# Allegro board H313_REF_LPDDR4_32X1-4L-200119-V163.brd
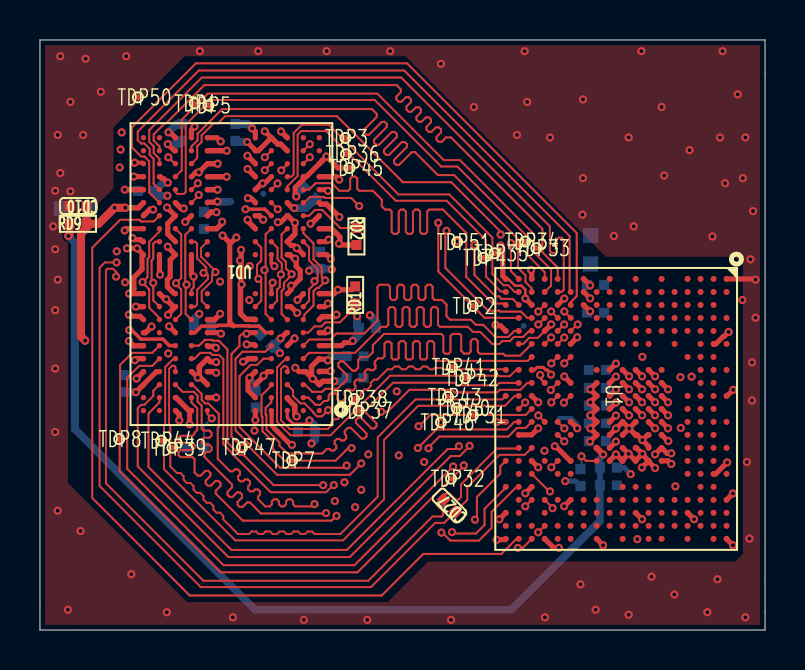
[diagram p0: board, top side]
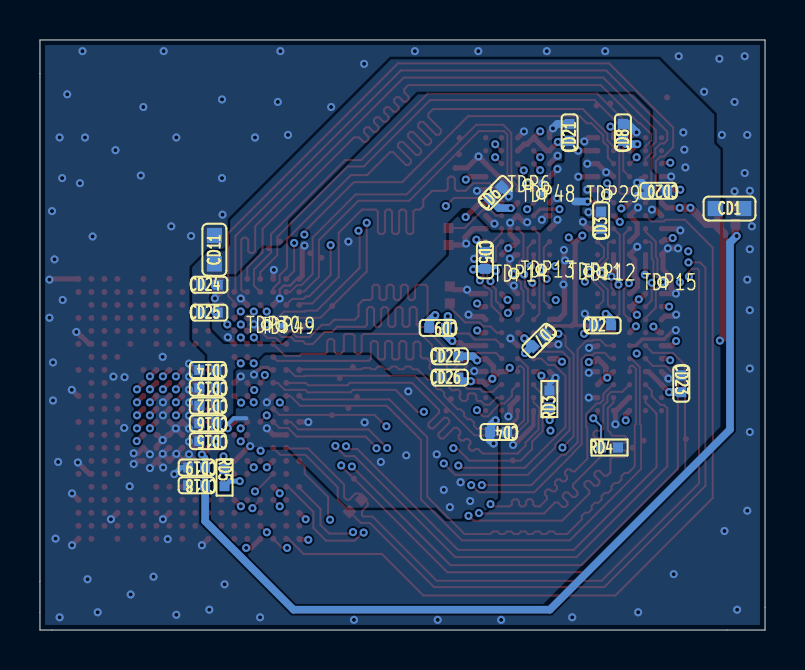
[diagram p1: board, bottom side, seen from below]

Outline 36.29 x 29.51 mm; copper layers: TOP, L2, L3, BOTTOM. Coordinates in mm from the lower left corner of the outline.
Outline path: 0,29.51 0,0 36.29,0 36.29,29.51 0,29.51

## Design rules (mm)
net group SCK: nets SCKN SCKP
net group SDQS0: nets SDQS0N SDQS0P
net group SDQS1: nets SDQS1N SDQS1P
net group SDQS2: nets SDQS2N SDQS2P
net group SDQS3: nets SDQS3N SDQS3P
net group DDR-DQ-DQM1-200MIL: nets SDQ8 SDQ9 SDQ10 SDQ11 SDQ12 SDQ13 SDQ14 SDQ15 SDQM1
net group DDR-DQ-DQS0-500MIL: nets SDQ0 SDQ2 SDQ3 SDQ4 SDQ5 SDQ6 SDQ7 SDQM0
net group DDR-DQ-DQS2-500MIL: nets SDQ17 SDQ18 SDQ19 SDQ20 SDQ21 SDQ22 SDQ23 SDQM2
net group DDR-DQ-DQS3-500MIL: nets SDQ24 SDQ25 SDQ26 SDQ27 SDQ28 SDQ30 SDQ31 SDQM3

## Placement (name value [footprint] x y rotation side)
CD1  NC-10uF-6.3V  [C0603]  1.78 21.08 180 bottom
CD2  1uF  [C0402]  8.13 15.24 180 bottom
CD3  NC-1uF  [C0402]  8.2 20.5 90 bottom
CD4  1uF  [C0402]  13.33 9.91 0 bottom
CD5  104  [C0402]  14.02 18.49 270 bottom
CD6  104  [C0402]  13.49 21.87 135 bottom
CD7  104  [C0402]  11.3 14.48 315 bottom
CD8  104  [C0402]  7.11 24.89 90 bottom
CD9  1uF  [C0402]  16.38 15.11 0 bottom
CD10  104  [C0402]  1.91 21.21 180 top
CD11  NC-10uF-6.3V  [C0603]  27.56 19.02 90 bottom
CD12  2.2nF  [C0402]  27.89 11.23 0 bottom
CD13  1uF  [C0402]  27.89 12.12 0 bottom
CD14  NC-4.7nF  [C0402]  27.89 13 0 bottom
CD15  2.2nF  [C0402]  27.89 9.45 0 bottom
CD16  2.2nF  [C0402]  27.89 10.34 0 bottom
CD18  1uF  [C0402]  28.45 7.24 0 bottom
CD19  104  [C0402]  28.45 8.13 0 bottom
CD20  NC-1uF  [C0402]  5.33 21.97 0 bottom
CD21  1uF  [C0402]  9.78 24.89 90 bottom
CD22  NC-104  [C0402]  15.77 13.69 180 bottom
CD23  104  [C0402]  4.19 12.32 270 bottom
CD24  NC-1uF  [C0402]  27.81 17.27 180 bottom
CD25  NC-104  [C0402]  27.81 15.88 180 bottom
CD26  104  [C0402]  15.77 12.62 180 bottom
CD27  NC/2.2pf  [C0402]  20.5 6.22 135 top
RD1  100K  [R0402]  15.77 16.76 90 top
RD2  100K  [R0402]  15.84 19.68 270 top
RD3  240R-1%  [R0402]  10.79 11.56 90 bottom
RD4  240R-1%  [R0402]  7.78 9.13 180 bottom
RD5  240R-1%  [R0402]  27.05 7.62 270 bottom
RD9  0R  [R0402]  1.91 20.32 0 top
TDP1  SDQS0P  [TP30]  7.75 26.34 0 top
TDP2  SDQ1  [TP30]  21.67 16.21 0 top
TDP3  SDQS1P  [TP30]  15.29 24.61 0 top
TDP4  SDQS1N  [TP30]  22.2 18.62 0 top
TDP5  SDQS0N  [TP30]  8.43 26.24 0 top
TDP6  SDQ11  [TP30]  11.86 22.3 180 bottom
TDP7  SDQ16  [TP30]  12.62 8.48 0 top
TDP8  SDQ29  [TP30]  3.96 9.55 0 top
TDP11  SCKP  [TP30]  8.81 17.93 180 bottom
TDP12  SCKN  [TP30]  8.15 17.88 180 bottom
TDP13  SCS0  [TP30]  11.2 18.03 180 bottom
TDP14  SCS1  [TP30]  12.57 17.83 180 bottom
TDP15  SA4  [TP30]  5.11 17.4 180 bottom
TDP29  SDQ1  [TP30]  7.92 21.79 180 bottom
TDP30  SDQ11  [TP30]  24.94 15.27 180 bottom
TDP31  SDQ16  [TP30]  21.67 10.74 0 top
TDP32  SDQ29  [TP30]  20.57 7.57 0 top
TDP33  SDQS0P  [TP30]  24.84 19.1 0 top
TDP34  SDQS0N  [TP30]  24.28 19.43 0 top
TDP35  SDQS1P  [TP30]  22.76 18.85 0 top
TDP36  SDQS1N  [TP30]  15.32 23.8 0 top
TDP37  SDQS2N  [TP30]  15.95 10.97 0 top
TDP38  SDQS2P  [TP30]  15.72 11.56 0 top
TDP39  SDQS3P  [TP30]  6.63 9.12 0 top
TDP40  SDQS3N  [TP30]  20.85 11.1 0 top
TDP41  SDQS2P  [TP30]  20.62 13.16 0 top
TDP42  SDQS2N  [TP30]  21.29 12.6 0 top
TDP43  SDQS3P  [TP30]  20.42 11.66 0 top
TDP44  SDQS3N  [TP30]  6.07 9.47 0 top
TDP45  GND  [TP30]  15.49 23.11 0 top
TDP46  GND  [TP30]  20.07 10.39 0 top
TDP47  GND  [TP30]  10.11 9.14 0 top
TDP48  GND  [TP30]  11.18 21.82 180 bottom
TDP49  GND  [TP30]  24.21 15.21 180 bottom
TDP50  GND  [TP30]  4.9 26.64 0 top
TDP51  GND  [TP30]  20.88 19.41 0 top
U1  H313-BGA-284  [BGA284P65B1200_1400H125]  28.84 11.06 270 top
UD1  LPDDR4_FBGA200  [BGA200P65_80B1000_1500H90]  9.58 17.8 180 top

## Library data of the parts
CD1 CD11 = C-C0603-X5R
CD2-CD10 CD12-CD16 CD18-CD27 = C-C0402-X5R_0
RD1 RD2 = R-R0402-5%_0
RD3-RD5 RD9 = R-R0402-1%_0
TDP1-TDP8 TDP11-TDP15 TDP29-TDP51 = TestPoint-on wire
U1 = H313-BGA-284
UD1 = LPDDR4_FBGA200

## Footprints (pads in the part's own frame, mm; a bottom-side part is the same pattern mirrored in y, then rotated)
BGA200P65_80B1000_1500H90
  round 0.27 smd: A1(-4.4,6.825) A2(-3.6,6.825) A3(-2.8,6.825) A4(-2,6.825) A5(-1.2,6.825) A8(1.2,6.825) A9(2,6.825) A10(2.8,6.825) A11(3.6,6.825) A12(4.4,6.825) AA1(-4.4,-6.175) AA2(-3.6,-6.175) AA3(-2.8,-6.175) AA4(-2,-6.175) AA5(-1.2,-6.175) AA8(1.2,-6.175) AA9(2,-6.175) AA10(2.8,-6.175) AA11(3.6,-6.175) AA12(4.4,-6.175) AB1(-4.4,-6.825) AB2(-3.6,-6.825) AB3(-2.8,-6.825) AB4(-2,-6.825) AB5(-1.2,-6.825) AB8(1.2,-6.825) AB9(2,-6.825) AB10(2.8,-6.825) AB11(3.6,-6.825) AB12(4.4,-6.825) B1(-4.4,6.175) B2(-3.6,6.175) B3(-2.8,6.175) B4(-2,6.175) B5(-1.2,6.175) B8(1.2,6.175) B9(2,6.175) B10(2.8,6.175) B11(3.6,6.175) B12(4.4,6.175) C1(-4.4,5.525) C2(-3.6,5.525) C3(-2.8,5.525) C4(-2,5.525) C5(-1.2,5.525) C8(1.2,5.525) C9(2,5.525) C10(2.8,5.525) C11(3.6,5.525) C12(4.4,5.525) D1(-4.4,4.875) D2(-3.6,4.875) D3(-2.8,4.875) D4(-2,4.875) D5(-1.2,4.875) D8(1.2,4.875) D9(2,4.875) D10(2.8,4.875) D11(3.6,4.875) D12(4.4,4.875) E1(-4.4,4.225) E2(-3.6,4.225) E3(-2.8,4.225) E4(-2,4.225) E5(-1.2,4.225) E8(1.2,4.225) E9(2,4.225) E10(2.8,4.225) E11(3.6,4.225) E12(4.4,4.225) F1(-4.4,3.575) F2(-3.6,3.575) F3(-2.8,3.575) F4(-2,3.575) F5(-1.2,3.575) F8(1.2,3.575) F9(2,3.575) F10(2.8,3.575) F11(3.6,3.575) F12(4.4,3.575) G1(-4.4,2.925) G2(-3.6,2.925) G3(-2.8,2.925) G4(-2,2.925) G5(-1.2,2.925) G8(1.2,2.925) G9(2,2.925) G10(2.8,2.925) G11(3.6,2.925) G12(4.4,2.925) H1(-4.4,2.275) H2(-3.6,2.275) H3(-2.8,2.275) H4(-2,2.275) H5(-1.2,2.275) H8(1.2,2.275) H9(2,2.275) H10(2.8,2.275) H11(3.6,2.275) H12(4.4,2.275) J1(-4.4,1.625) J2(-3.6,1.625) J3(-2.8,1.625) J4(-2,1.625) J5(-1.2,1.625) J8(1.2,1.625) J9(2,1.625) J10(2.8,1.625) J11(3.6,1.625) J12(4.4,1.625) K1(-4.4,0.975) K2(-3.6,0.975) K3(-2.8,0.975) K4(-2,0.975) K5(-1.2,0.975) K8(1.2,0.975) K9(2,0.975) K10(2.8,0.975) K11(3.6,0.975) K12(4.4,0.975) N1(-4.4,-0.975) N2(-3.6,-0.975) N3(-2.8,-0.975) N4(-2,-0.975) N5(-1.2,-0.975) N8(1.2,-0.975) N9(2,-0.975) N10(2.8,-0.975) N11(3.6,-0.975) N12(4.4,-0.975) P1(-4.4,-1.625) P2(-3.6,-1.625) P3(-2.8,-1.625) P4(-2,-1.625) P5(-1.2,-1.625) P8(1.2,-1.625) P9(2,-1.625) P10(2.8,-1.625) P11(3.6,-1.625) P12(4.4,-1.625) R1(-4.4,-2.275) R2(-3.6,-2.275) R3(-2.8,-2.275) R4(-2,-2.275) R5(-1.2,-2.275) R8(1.2,-2.275) R9(2,-2.275) R10(2.8,-2.275) R11(3.6,-2.275) R12(4.4,-2.275) T1(-4.4,-2.925) T2(-3.6,-2.925) T3(-2.8,-2.925) T4(-2,-2.925) T5(-1.2,-2.925) T8(1.2,-2.925) T9(2,-2.925) T10(2.8,-2.925) T11(3.6,-2.925) T12(4.4,-2.925) U1(-4.4,-3.575) U2(-3.6,-3.575) U3(-2.8,-3.575) U4(-2,-3.575) U5(-1.2,-3.575) U8(1.2,-3.575) U9(2,-3.575) U10(2.8,-3.575) U11(3.6,-3.575) U12(4.4,-3.575) V1(-4.4,-4.225) V2(-3.6,-4.225) V3(-2.8,-4.225) V4(-2,-4.225) V5(-1.2,-4.225) V8(1.2,-4.225) V9(2,-4.225) V10(2.8,-4.225) V11(3.6,-4.225) V12(4.4,-4.225) W1(-4.4,-4.875) W2(-3.6,-4.875) W3(-2.8,-4.875) W4(-2,-4.875) W5(-1.2,-4.875) W8(1.2,-4.875) W9(2,-4.875) W10(2.8,-4.875) W11(3.6,-4.875) W12(4.4,-4.875) Y1(-4.4,-5.525) Y2(-3.6,-5.525) Y3(-2.8,-5.525) Y4(-2,-5.525) Y5(-1.2,-5.525) Y8(1.2,-5.525) Y9(2,-5.525) Y10(2.8,-5.525) Y11(3.6,-5.525) Y12(4.4,-5.525)
BGA284P65B1200_1400H125
  round 0.3 smd: A1(-6.5,5.525) A2(-5.85,5.525) A4(-4.55,5.525) A6(-3.25,5.525) A8(-1.95,5.525) A10(-0.65,5.525) A12(0.65,5.525) A14(1.95,5.525) A16(3.25,5.525) A18(4.55,5.525) A19(5.2,5.525) A20(5.85,5.525) A21(6.5,5.525) B1(-6.5,4.875) B2(-5.85,4.875) B3(-5.2,4.875) B4(-4.55,4.875) B5(-3.9,4.875) B6(-3.25,4.875) B7(-2.6,4.875) B8(-1.95,4.875) B9(-1.3,4.875) B10(-0.65,4.875) B11(0,4.875) B12(0.65,4.875) B13(1.3,4.875) B14(1.95,4.875) B15(2.6,4.875) B16(3.25,4.875) B17(3.9,4.875) B18(4.55,4.875) B19(5.2,4.875) B20(5.85,4.875) B21(6.5,4.875) C1(-6.5,4.225) C2(-5.85,4.225) C3(-5.2,4.225) C4(-4.55,4.225) C5(-3.9,4.225) C6(-3.25,4.225) C7(-2.6,4.225) C8(-1.95,4.225) C9(-1.3,4.225) C10(-0.65,4.225) C11(0,4.225) C12(0.65,4.225) C13(1.3,4.225) C14(1.95,4.225) C15(2.6,4.225) C16(3.25,4.225) C17(3.9,4.225) C18(4.55,4.225) C19(5.2,4.225) C20(5.85,4.225) D1(-6.5,3.575) D2(-5.85,3.575) D3(-5.2,3.575) D4(-4.55,3.575) D5(-3.9,3.575) D7(-2.6,3.575) D10(-0.65,3.575) D11(0,3.575) D12(0.65,3.575) D13(1.3,3.575) D14(1.95,3.575) D15(2.6,3.575) D16(3.25,3.575) D18(4.55,3.575) D19(5.2,3.575) D20(5.85,3.575) D21(6.5,3.575) E2(-5.85,2.925) E3(-5.2,2.925) E4(-4.55,2.925) E5(-3.9,2.925) E6(-3.25,2.925) E18(4.55,2.925) E19(5.2,2.925) E20(5.85,2.925) F1(-6.5,2.275) F2(-5.85,2.275) F3(-5.2,2.275) F4(-4.55,2.275) F5(-3.9,2.275) F8(-1.95,2.275) F9(-1.3,2.275) F10(-0.65,2.275) F11(0,2.275) F12(0.65,2.275) F13(1.3,2.275) F14(1.95,2.275) F15(2.6,2.275) F18(4.55,2.275) F19(5.2,2.275) F20(5.85,2.275) F21(6.5,2.275) G2(-5.85,1.625) G3(-5.2,1.625) G4(-4.55,1.625) G5(-3.9,1.625) G6(-3.25,1.625) G8(-1.95,1.625) G9(-1.3,1.625) G10(-0.65,1.625) G11(0,1.625) G12(0.65,1.625) G13(1.3,1.625) G14(1.95,1.625) G15(2.6,1.625) G17(3.9,1.625) G18(4.55,1.625) G19(5.2,1.625) G20(5.85,1.625) G21(6.5,1.625) H1(-6.5,0.975) H2(-5.85,0.975) H3(-5.2,0.975) H4(-4.55,0.975) H5(-3.9,0.975) H6(-3.25,0.975) H8(-1.95,0.975) H9(-1.3,0.975) H10(-0.65,0.975) H11(0,0.975) H12(0.65,0.975) H13(1.3,0.975) H14(1.95,0.975) H15(2.6,0.975) H17(3.9,0.975) H18(4.55,0.975) H19(5.2,0.975) H20(5.85,0.975) J2(-5.85,0.325) J3(-5.2,0.325) J6(-3.25,0.325) J8(-1.95,0.325) J9(-1.3,0.325) J10(-0.65,0.325) J11(0,0.325) J12(0.65,0.325) J13(1.3,0.325) J14(1.95,0.325) J15(2.6,0.325) J17(3.9,0.325) J18(4.55,0.325) J19(5.2,0.325) J20(5.85,0.325) J21(6.5,0.325) K1(-6.5,-0.325) K2(-5.85,-0.325) K3(-5.2,-0.325) K4(-4.55,-0.325) K5(-3.9,-0.325) K6(-3.25,-0.325) K8(-1.95,-0.325) K9(-1.3,-0.325) K10(-0.65,-0.325) K11(0,-0.325) K12(0.65,-0.325) K13(1.3,-0.325) K14(1.95,-0.325) K15(2.6,-0.325) K18(4.55,-0.325) K19(5.2,-0.325) K20(5.85,-0.325) L2(-5.85,-0.975) L3(-5.2,-0.975) L4(-4.55,-0.975) L5(-3.9,-0.975) L6(-3.25,-0.975) L8(-1.95,-0.975) L9(-1.3,-0.975) L10(-0.65,-0.975) L11(0,-0.975) L12(0.65,-0.975) L13(1.3,-0.975) L14(1.95,-0.975) L15(2.6,-0.975) L18(4.55,-0.975) L19(5.2,-0.975) L20(5.85,-0.975) L21(6.5,-0.975) M1(-6.5,-1.625) M2(-5.85,-1.625) M3(-5.2,-1.625) M18(4.55,-1.625) M19(5.2,-1.625) M20(5.85,-1.625) N2(-5.85,-2.275) N3(-5.2,-2.275) N4(-4.55,-2.275) N5(-3.9,-2.275) N6(-3.25,-2.275) N7(-2.6,-2.275) N9(-1.3,-2.275) N10(-0.65,-2.275) N12(0.65,-2.275) N13(1.3,-2.275) N15(2.6,-2.275) N16(3.25,-2.275) N18(4.55,-2.275) N19(5.2,-2.275) N20(5.85,-2.275) N21(6.5,-2.275) P1(-6.5,-2.925) P2(-5.85,-2.925) P3(-5.2,-2.925) P4(-4.55,-2.925) P5(-3.9,-2.925) P6(-3.25,-2.925) P7(-2.6,-2.925) P9(-1.3,-2.925) P10(-0.65,-2.925) P12(0.65,-2.925) P13(1.3,-2.925) P15(2.6,-2.925) P16(3.25,-2.925) P18(4.55,-2.925) P20(5.85,-2.925) P21(6.5,-2.925) R1(-6.5,-3.575) R2(-5.85,-3.575) R3(-5.2,-3.575) R4(-4.55,-3.575) R5(-3.9,-3.575) R6(-3.25,-3.575) R9(-1.3,-3.575) R12(0.65,-3.575) R15(2.6,-3.575) R18(4.55,-3.575) R19(5.2,-3.575) R20(5.85,-3.575) R21(6.5,-3.575) T1(-6.5,-4.225) T2(-5.85,-4.225) T3(-5.2,-4.225) T4(-4.55,-4.225) T5(-3.9,-4.225) T6(-3.25,-4.225) T7(-2.6,-4.225) T8(-1.95,-4.225) T9(-1.3,-4.225) T10(-0.65,-4.225) T11(0,-4.225) T12(0.65,-4.225) T14(1.95,-4.225) T15(2.6,-4.225) T16(3.25,-4.225) T17(3.9,-4.225) T18(4.55,-4.225) T20(5.85,-4.225) T21(6.5,-4.225) U1(-6.5,-4.875) U2(-5.85,-4.875) U3(-5.2,-4.875) U4(-4.55,-4.875) U5(-3.9,-4.875) U6(-3.25,-4.875) U8(-1.95,-4.875) U9(-1.3,-4.875) U10(-0.65,-4.875) U11(0,-4.875) U12(0.65,-4.875) U13(1.3,-4.875) U14(1.95,-4.875) U15(2.6,-4.875) U16(3.25,-4.875) U17(3.9,-4.875) U18(4.55,-4.875) U19(5.2,-4.875) U20(5.85,-4.875) U21(6.5,-4.875) V1(-6.5,-5.525) V2(-5.85,-5.525) V3(-5.2,-5.525) V5(-3.9,-5.525) V8(-1.95,-5.525) V10(-0.65,-5.525) V12(0.65,-5.525) V15(2.6,-5.525) V17(3.9,-5.525) V19(5.2,-5.525) V20(5.85,-5.525) V21(6.5,-5.525)
C0402
  rect 0.5x0.5 smd: 1(-0.425,0) 2(0.425,0)
C0603
  rect 0.76x0.76 smd: 1(-0.71,0) 2(0.71,0)
R0402
  rect 0.5x0.5 smd: 1(-0.425,0) 2(0.425,0)
TP30
  round 0.3 smd: 1(0,0)

## Nets
GND: CD1.2 CD2.2 CD3.2 CD4.2 CD5.2 CD6.2 CD7.2 CD8.2 CD9.2 CD10.2 CD11.2 CD12.2 CD13.2 CD14.2 CD15.2 CD16.2 CD18.2 CD19.2 CD20.2 CD21.2 CD22.2 CD23.2 CD24.2 CD25.2 CD26.2 RD5.2 TDP45.1(TP) TDP46.1(TP) TDP47.1(TP) TDP48.1(TP) TDP49.1(TP) TDP50.1(TP) TDP51.1(TP) U1.A1(GND1) U1.A10(GND2) U1.A18(GND3) U1.A21(GND4) U1.B6(GND5) U1.B16(GND6) U1.D19(GND7) U1.F14(GND8) U1.F15(GND9) U1.G13(GND10) U1.G14(GND11) U1.G15(GND12) U1.H10(GND13) U1.H11(GND14) U1.H12(GND15) U1.H13(GND16) U1.H14(GND17) U1.H15(GND18) U1.H19(GND19) U1.J12(GND20) U1.J13(GND21) U1.J14(GND22) U1.J15(GND23) U1.K8(GND25) U1.K9(GND26) U1.K10(GND27) U1.K11(GND28) U1.K12(GND29) U1.K13(GND30) U1.K14(GND31) U1.K15(GND32) U1.L21(GND33) U1.M1(GND24) U1.M2(GND34) U1.M3(GND35) U1.N6(GND36) U1.N9(GND37) U1.N12(GND38) U1.N15(GND39) U1.N18(GND40) U1.P3(GND41) U1.R5(GND42) U1.R21(GND43) U1.T1(GND44) U1.T3(GND45) U1.T8(GND46) U1.T10(GND47) U1.T15(GND48) U1.T17(GND49) U1.U6(GND50) U1.U13(GND51) U1.V1(GND52) U1.V5(GND53) U1.V12(GND54) U1.V19(GND55) U1.V21(GND56) UD1.A3(VSS0) UD1.A10(VSS1) UD1.AB3(VSS54) UD1.AB5(VSS55) UD1.AB8(VSS56) UD1.AB10(VSS57) UD1.C1(VSS2) UD1.C5(VSS3) UD1.C8(VSS4) UD1.C12(VSS5) UD1.D2(VSS6) UD1.D4(VSS7) UD1.D9(VSS8) UD1.D11(VSS9) UD1.E1(VSS10) UD1.E5(VSS11) UD1.E8(VSS12) UD1.E12(VSS13) UD1.G1(VSS14) UD1.G3(VSS15) UD1.G5(VSS16) UD1.G8(VSS17) UD1.G10(VSS18) UD1.G12(VSS19) UD1.J1(VSS20) UD1.J3(VSS21) UD1.J10(VSS22) UD1.J12(VSS23) UD1.K2(VSS24) UD1.K4(VSS25) UD1.K9(VSS26) UD1.K11(VSS27) UD1.N2(VSS28) UD1.N4(VSS29) UD1.N9(VSS30) UD1.N11(VSS31) UD1.P1(VSS32) UD1.P3(VSS33) UD1.P10(VSS34) UD1.P12(VSS35) UD1.T1(VSS36) UD1.T3(VSS37) UD1.T5(VSS38) UD1.T8(VSS39) UD1.T10(VSS40) UD1.T12(VSS41) UD1.V1(VSS42) UD1.V5(VSS43) UD1.V8(VSS44) UD1.V12(VSS45) UD1.W2(VSS46) UD1.W4(VSS47) UD1.W9(VSS48) UD1.W11(VSS49) UD1.Y1(VSS50) UD1.Y5(VSS51) UD1.Y8(VSS52) UD1.Y12(VSS53)
VCC-DRAM: CD1.1 CD2.1 CD3.1 CD4.1 CD5.1 CD6.1 CD7.1 CD8.1 CD11.1 CD12.1 CD13.1 CD14.1 CD15.1 CD16.1 CD20.1 CD21.1 CD22.1 CD23.1 CD24.1 CD25.1 CD26.1 RD1.2 RD2.2 RD3.2 RD4.2 U1.L9(VCC_DRAM1) U1.L10(VCC_DRAM2) U1.L11(VCC_DRAM3) U1.L12(VCC_DRAM4) U1.L13(VCC_DRAM5) UD1.A4(VDD2-0) UD1.A9(VDD2-1) UD1.AA3(VDDQ-16) UD1.AA5(VDDQ-17) UD1.AA8(VDDQ-18) UD1.AA10(VDDQ-19) UD1.AB4(VDD2-22) UD1.AB9(VDD2-23) UD1.B3(VDDQ-0) UD1.B5(VDDQ-1) UD1.B8(VDDQ-2) UD1.B10(VDDQ-3) UD1.D1(VDDQ-4) UD1.D5(VDDQ-5) UD1.D8(VDDQ-6) UD1.D12(VDDQ-7) UD1.F3(VDDQ-8) UD1.F5(VDD2-2) UD1.F8(VDD2-3) UD1.F10(VDDQ-9) UD1.H1(VDD2-4) UD1.H5(VDD2-5) UD1.H8(VDD2-6) UD1.H12(VDD2-7) UD1.K1(VDD2-8) UD1.K3(VDD2-9) UD1.K10(VDD2-10) UD1.K12(VDD2-11) UD1.N1(VDD2-12) UD1.N3(VDD2-13) UD1.N10(VDD2-14) UD1.N12(VDD2-15) UD1.R1(VDD2-16) UD1.R5(VDD2-17) UD1.R8(VDD2-18) UD1.R12(VDD2-19) UD1.U3(VDDQ-10) UD1.U5(VDD2-20) UD1.U8(VDD2-21) UD1.U10(VDDQ-11) UD1.W1(VDDQ-12) UD1.W5(VDDQ-13) UD1.W8(VDDQ-14) UD1.W12(VDDQ-15)
VDD18-DRAM: CD18.1 CD19.1 RD9.1 U1.L14(VDD18_DRAM)
VDD18-LPDDR: CD9.1 CD10.1 RD9.2 UD1.F1(VDD1-0) UD1.F12(VDD1-1) UD1.G4(VDD1-2) UD1.G9(VDD1-3) UD1.T4(VDD1-4) UD1.T9(VDD1-5) UD1.U1(VDD1-6) UD1.U12(VDD1-7)
VDD-CPU: U1.H8(VDD_CPU1) U1.H9(VDD_CPU2) U1.J8(VDD_CPU3) U1.J9(VDD_CPU4) U1.J10(VDD_CPU5) U1.J11(VDD_CPU6)
VDD-GPU: U1.F9(VDD_GPU1) U1.F10(VDD_GPU2) U1.G8(VDD_GPU3) U1.G9(VDD_GPU4)
VDD-SYS: U1.F11(VDD_SYS1) U1.F12(VDD_SYS2) U1.F13(VDD_SYS3) U1.G10(VDD_SYS4) U1.G11(VDD_SYS5) U1.G12(VDD_SYS6)
SA0: U1.U17(SA1) UD1.H2(CA0_A) UD1.R2(CA0_B)
SA1: U1.V17(SCS0) UD1.J2(CA1_A) UD1.P2(CA1_B)
SA2: U1.T21(SA0) UD1.H9(CA2_A) UD1.R9(CA2_B)
SA3: U1.R20(SCS1) UD1.H10(CA3_A) UD1.R10(CA3_B)
SA4: TDP15.1(TP) U1.R18(SA4) UD1.H11(CA4_A) UD1.R11(CA4_B)
SA5: U1.T16(SA3) UD1.J11(CA5_A) UD1.P11(CA5_B)
SCKE0: U1.V15(SCKE0) UD1.J4(CKE0_A) UD1.P4(CKE0_B)
SCKE1: U1.P13(SCKE1) UD1.J5(CKE1_A) UD1.P5(CKE1_B)
SCKN: CD27.2 TDP12.1(TP) U1.U14(SCKN) UD1.J9(CK_C_A) UD1.P9(CK_C_B)
SCKP: CD27.1 TDP11.1(TP) U1.T14(SCKP) UD1.J8(CK_T_A) UD1.P8(CK_T_B)
SCS0: TDP13.1(TP) U1.T18(SA2) UD1.H4(CS0_A) UD1.R4(CS0_B)
SCS1: TDP14.1(TP) U1.P15(SA5) UD1.H3(CS1_A) UD1.R3(CS1_B)
SDQ0: U1.N3(SDQ0) UD1.U11(DQ11_B)
SDQ1: TDP2.1(TP) TDP29.1(TP) U1.U4(SDQ1) UD1.U9(DQ12_B)
SDQ2: U1.N2(SDQ2) UD1.V11(DQ10_B)
SDQ3: U1.T4(SDQ3) UD1.V9(DQ13_B)
SDQ4: U1.U3(SDQ4) UD1.Y9(DQ14_B)
SDQ5: U1.P1(SDQ5) UD1.AA11(DQ8_B)
SDQ6: U1.T2(SDQ6) UD1.AA9(DQ15_B)
SDQ7: U1.P2(SDQ7) UD1.Y11(DQ9_B)
SDQ8: U1.P5(SDQ8) UD1.Y4(DQ6_B)
SDQ9: U1.V3(SDQ9) UD1.V2(DQ2_B)
SDQ10: U1.P4(SDQ10) UD1.Y2(DQ1_B)
SDQ11: TDP6.1(TP) TDP30.1(TP) U1.R4(SDQ11) UD1.V4(DQ5_B)
SDQ12: U1.R6(SDQ12) UD1.U2(DQ3_B)
SDQ13: U1.N4(SDQ13) UD1.AA2(DQ0_B)
SDQ14: U1.P6(SDQ14) UD1.U4(DQ4_B)
SDQ15: U1.N5(SDQ15) UD1.AA4(DQ7_B)
SDQ16: TDP7.1(TP) TDP31.1(TP) U1.T11(SDQ16) UD1.C4(DQ6_A)
SDQ17: U1.U12(SDQ17) UD1.F4(DQ4_A)
SDQ18: U1.T12(SDQ18) UD1.E4(DQ5_A)
SDQ19: U1.U9(SDQ19) UD1.B4(DQ7_A)
SDQ20: U1.T6(SDQ20) UD1.C2(DQ1_A)
SDQ21: U1.U5(SDQ21) UD1.F2(DQ3_A)
SDQ22: U1.T7(SDQ22) UD1.B2(DQ0_A)
SDQ23: U1.T5(SDQ23) UD1.E2(DQ2_A)
SDQ24: U1.R9(SDQ24) UD1.C9(DQ14_A)
SDQ25: U1.P7(SDQ25) UD1.E9(DQ13_A)
SDQ26: U1.N7(SDQ26) UD1.F9(DQ12_A)
SDQ27: U1.P9(SDQ27) UD1.B11(DQ8_A)
SDQ28: U1.P10(SDQ28) UD1.C11(DQ9_A)
SDQ29: TDP8.1(TP) TDP32.1(TP) U1.U11(SDQ29) UD1.F11(DQ11_A)
SDQ30: U1.P12(SDQ30) UD1.B9(DQ15_A)
SDQ31: U1.R12(SDQ31) UD1.E11(DQ10_A)
SDQM0: U1.U1(SDQM0) UD1.Y10(DM1_B)
SDQM1: U1.R3(SDQM1) UD1.Y3(DM0_B)
SDQM2: U1.T9(SDQM2) UD1.C3(DM0_A)
SDQM3: U1.N10(SDQM3) UD1.C10(DM1_A)
SDQS0N: TDP5.1(TP) TDP34.1(TP) U1.R1(SDQS0N) UD1.V10(DQS1N_B)
SDQS0P: TDP1.1(TP) TDP33.1(TP) U1.R2(SDQS0P) UD1.W10(DQS1P_B)
SDQS1N: TDP4.1(TP) TDP36.1(TP) U1.V2(SDQS1N) UD1.V3(DQS0N_B)
SDQS1P: TDP3.1(TP) TDP35.1(TP) U1.U2(SDQS1P) UD1.W3(DQS0P_B)
SDQS2N: TDP37.1(TP) TDP42.1(TP) U1.U8(SDQS2N) UD1.E3(DQS0N_A)
SDQS2P: TDP38.1(TP) TDP41.1(TP) U1.V8(SDQS2P) UD1.D3(DQS0P_A)
SDQS3N: TDP40.1(TP) TDP44.1(TP) U1.U10(SDQS3N) UD1.E10(DQS1N_A)
SDQS3P: TDP39.1(TP) TDP43.1(TP) U1.V10(SDQS3P) UD1.D10(DQS1P_A)
SRST: U1.U21(SRST) UD1.T11(RESET-N)
N19644580: RD4.1 UD1.A8(ZQ1)
N19644582: RD3.1 UD1.A5(ZQ0)
N19645175: RD1.1 UD1.G2(ODT_CA_A)
N19645177: RD2.1 UD1.T2(ODT_CA_B)
N21119201: RD5.1 U1.L15(SZQ)

Pads without a net: U1 A2 A4 A6 A8 A12 A14 A16 A19 A20 B1 B2 B3 B4 B5 B7 B8 B9 B10 B11 B12 B13 B14 B15 B17 B18 B19 B20 B21 C1 C2 C3 C4 C5 C6 C7 C8 C9 C10 C11 C12 C13 C14 C15 C16 C17 C18 C19 C20 D1 D2 D3 D4 D5 D7 D10 D11 D12 D13 D14 D15 D16 D18 D20 D21 E2 E3 E4 E5 E6 E18 E19 E20 F1 F2 F3 F4 F5 F8 F18 F19 F20 F21 G2 G3 G4 G5 G6 G17 G18 G19 G20 G21 H1 H2 H3 H4 H5 H6 H17 H18 H20 J2 J3 J6 J17 J18 J19 J20 J21 K1 K2 K3 K4 K5 K6 K18 K19 K20 L2 L3 L4 L5 L6 L8 L18 L19 L20 M18 M19 M20 N13 N16 N19 N20 N21 P16 P18 P20 P21 R15 R19 T20 U15 U16 U18 U19 U20 V20; UD1 A1 A2 A11 A12 AA1 AA12 AB1 AB2 AB11 AB12 B1 B12 G11 K5 K8 N5 N8

## Via types
v1: diameter 0.406, hole 0.203, TOP to BOTTOM, 364 vias

## Routing (per net, layer and track width the routed paths; a pad name or vN(x,y) marks a point on that pad's centre or on a via; arc(x,y) is an arc through that point)
GND: length 103.9
  TOP w0.102: U1.U6 24.19,14.31 24.49,14.61 24.92,14.61 U1.R5 ; v1(10.14,9.13) 9.58,9.68 9.58,13.8 9.98,14.2 9.98,14.68 10.11,14.81 10.32,14.81 v1(10.34,14.82) ; UD1.K9 7.58,17.02 7.69,17.13 7.69,17.48 7.69,17.48 v1(7.69,17.68)
  TOP w0.127: U1.V1 23.43,17.56 23.77,17.23 24.09,17.23 24.29,17.03 v1(24.29,16.58)
  TOP w0.152: U1.T8 24.75,13.01 24.88,13.14 25.19,13.14 25.32,13.01 25.39,13.01 25.58,12.83 v1(25.58,12.78) ; UD1.A3 12.38,10.61 12.69,10.3 13.31,10.3 v1(13.49,10.48)
  TOP w0.178: v1(11.65,17.38) 11.65,17.31 11.58,17.24 UD1.K4 ; v1(11.73,18.2) 11.58,18.35 UD1.N4
  TOP w0.203: UD1.Y12 5.13,23.37 4.77,23.37 4.76,23.38 v1(4.74,23.38)
  TOP w0.254: v1(26.24,16.58) 26.2,16.55 26.2,16.55 U1.P3 ; v1(6.43,24.9) 6.5,24.9 6.56,24.84 6.56,24.84 UD1.AB10 ; 29.81,8.46 29.81,8.48 v1(30.15,8.81) ; 29.81,8.46 v1(29.46,8.81) ; 29.81,8.46 U1.H15 ; UD1.D9 7.6,12.93 v1(7.9,12.62) ; U1.G15 30.15,8.77 v1(30.15,8.81) ; U1.G15 30.46,8.42 v1(30.78,8.1) ; U1.G15 30.46,8.46 v1(30.12,8.13) ; v1(22.86,10.4) 22.87,10.41 U1.V12 ; U1.H11 v1(30.13,10.74) ; UD1.D2 12.97,12.93 v1(12.78,13.12) ; v1(29.46,8.81) 29.17,9.11 U1.J14 ; v1(29.46,8.81) 29.16,8.51 U1.J15 29.16,8.46 v1(28.83,8.79) 28.51,8.47 U1.K15 ; v1(14.42,21.97) 14.4,21.97 14.35,22.03 UD1.V1 ; U1.N15 26.54,8.46 25.81,9.19 v1(25.77,9.19) ; UD1.G8 9,14.88 v1(9.06,14.82) ; v1(12.87,15.86) 12.56,16.18 UD1.J3 ; v1(30.78,8.79) 31.11,9.11 U1.F14 31.39,8.84 v1(31.6,8.84) ; UD1.C12 5.83,12.93 UD1.D11 ; U1.V1 23.16,17.71 23.16,19.12 v1(23.05,19.23) ; U1.V5 23.05,15.23 22.84,15.23 v1(22.8,15.26) ; v1(12.05,14.59) 12.33,14.88 UD1.G3 ; U1.H14 29.85,9.11 v1(30.15,8.81) ; UD1.AB5 10.78,24.93 v1(10.62,25.1) ; U1.T10 v1(24.94,11.39) ; v1(34.7,12.01) 34.39,11.71 U1.A10 ; U1.R21 25.71,4.11 v1(25.97,4.11) ; U1.G14 30.46,9.19 v1(30.15,9.5) ; U1.K13 v1(28.83,10.08) 29.16,10.41 U1.J12 29.16,10.41 v1(29.49,10.08) ; U1.J13 29.17,9.76 v1(29.49,10.08) ; U1.T15 v1(24.93,8.14) ; UD1.G5 10.39,14.88 v1(10.34,14.82) ; v1(11.14,22.34) 11.24,22.34 UD1.W4 ; U1.A18 v1(34.68,6.83) ; UD1.W11 6.03,22.68 6.12,22.58 6.19,22.58 v1(6.4,22.37) ; v1(34.47,14.91) 34.25,14.69 34.21,14.69 33.83,14.31 U1.B6 ; UD1.G10 v1(6.46,15.19) ; v1(6.01,17.78) 5.98,17.81 UD1.N11 ; v1(25.58,15.29) 25.56,15.27 25.56,15.26 U1.R5 ; UD1.E1 13.99,13.58 14.02,13.54 14.36,13.54 v1(14.41,13.49) ; UD1.N2 13.18,18.79 12.87,19.1 12.85,19.1 v1(12.85,19.1) 12.72,19.23 12.57,19.23 UD1.P3 ; v1(30.15,9.5) 30.41,9.76 U1.G13 ; v1(30.15,9.5) 29.89,9.76 U1.H13 v1(29.49,10.08) ; UD1.J1 14.25,16.18 v1(14.41,16.33) ; U1.K8 v1(28.83,13.33) ; v1(11.19,12.72) 11.4,12.93 UD1.D4 ; U1.B16 33.82,7.81 v1(34.39,8.38) ; U1.A1 35.78,17.56 v1(35.81,17.53) ; UD1.N9 7.58,17.79 v1(7.69,17.68) ; v1(14.45,19.53) 14.35,19.43 UD1.P1 ; v1(29.49,10.08) 29.81,10.41 U1.H12 ; U1.K11 v1(28.83,11.38) ; U1.U13 24.61,9.76 v1(24.93,10.09) ; U1.F15 31.44,8.46 v1(31.6,8.31) ; U1.T17 v1(24.29,6.84) ; U1.K10 v1(28.83,12.03) ; v1(11.91,20.4) 12.06,20.4 UD1.T3 12.41,20.73 v1(12.76,20.37) 12.76,19.81 12.68,19.72 ; UD1.Y1 13.33,22.68 UD1.W2 13.18,22.54 12.78,22.14 12.78,21.74 v1(12.83,21.68) ; v1(12.89,16.51) 13.18,16.81 UD1.K2 ; v1(9.04,24.44) 8.86,24.63 UD1.AB8 ; UD1.P10 6.4,19.81 6.4,20.34 UD1.T10 6.77,20.73 v1(6.36,21.13) ; v1(14.34,23.69) 14.91,23.11 TDP45.1 ; v1(4.62,19.61) 4.71,19.52 5.04,19.52 5.14,19.43 UD1.P12 ; v1(32.74,5.54) 32.42,5.86 U1.D19 ; U1.K14 v1(28.83,9.43) ; v1(26.89,10.09) 26.57,10.41 U1.N12 ; v1(26.23,6.19) 26.56,6.51 U1.N18 ; U1.K12 v1(28.83,10.73) ; U1.N6 26.85,14.6 26.85,14.6 v1(26.89,14.64) ; v1(22.86,4.51) 22.93,4.51 22.94,4.52 23.27,4.52 U1.V21 ; U1.M1 v1(27.53,17.24) ; U1.H10 v1(30.13,11.39) ; U1.A21 v1(34.68,4.24) ; U1.K9 v1(28.83,12.68) ; U1.N9 v1(26.24,12.68) ; v1(24.58,18.02) 24.59,18.01 24.59,17.96 24.61,17.93 U1.T1 ; UD1.W9 7.8,22.9 v1(7.95,22.9) UD1.Y8 ; U1.L21 v1(28.18,4.24) ; U1.V19 v1(22.99,5.54) ; U1.M3 v1(27.53,15.94) ; U1.M2 v1(27.53,16.59) ; U1.H19 v1(30.13,5.54) ; U1.T3 v1(24.29,16.58)
  TOP w0.27: v1(4.24,22.03) UD1.V12 ; UD1.E12 4.83,13.58 v1(4.75,13.5) ; 13.59,12.63 13.59,12.63 ; 13.59,12.63 13.62,12.63 UD1.C1 14.15,12.45 v1(14.73,12.45) ; 13.59,12.63 13.59,12.62 v1(13.65,12.57) ; 13.59,12.63 13.3,12.93 UD1.D2 ; 13.59,12.63 13.59,13.19 UD1.E1 ; v1(5.66,21.03) 5.64,21.05 5.51,21.05 5.27,20.81 UD1.T12 ; UD1.K11 6.26,16.54 v1(6.32,16.54) 6.68,16.18 UD1.J10 6.41,15.81 v1(6.41,15.77) ; v1(10.16,13.42) 10.26,13.42 10.41,13.58 UD1.E5 ; v1(11.14,22.34) 11.09,22.34 UD1.V5 ; v1(10.38,23.72) UD1.Y5 ; v1(13.54,20.32) 13.58,20.32 UD1.T1 ; 7.9,12.66 7.88,12.66 7.98,12.76 7.98,13.09 7.98,13.09 7.98,13.17 UD1.E8 8.53,13.42 8.82,13.42 v1(8.82,13.4) ; 7.9,12.66 v1(7.9,12.62) ; 7.9,12.66 7.99,12.66 UD1.C8 ; v1(6.97,10.49) 6.97,10.78 UD1.A10 ; v1(4.8,16.18) UD1.J12 ; v1(14.34,23.69) 14.14,23.48 14.14,23.48 UD1.Y1 ; UD1.C5 11.2,12.7 11.2,12.74 11.19,12.75 11.19,12.75 v1(11.19,12.72) ; UD1.Y8 v1(8.9,23.33) ; 12.68,19.72 UD1.P3 ; v1(5.59,15.18) 5.28,14.88 UD1.G12 ; UD1.V8 v1(8.89,22.03) ; v1(4.8,11.9) UD1.C12 ; UD1.T8 8.56,20.91 8.83,20.91 v1(8.83,20.9) ; UD1.G1 14.31,14.88 14.39,14.96 14.41,14.96 14.41,14.99 14.43,15.01 14.41,15.01 v1(14.41,14.98) ; UD1.T5 10.97,20.73 v1(11.17,20.52) ; UD1.AB3 v1(12.07,24.94)
  BOTTOM w0.203: v1(26.89,10.09) 26.89,10.3 26.59,10.59 25.96,10.59
  BOTTOM w0.254: v1(29.57,7.8) 29.24,8.13 CD19.2 ; RD5.2 26.8,7.45 v1(26.29,7.45)
  BOTTOM w0.381: CD2.2 7.7,15.54 v1(7.97,15.82) ; 11.63,14.18 11.69,14.18 v1(12.01,13.85) ; 11.63,14.18 v1(12.05,14.59) ; 11.63,14.18 CD7.2 ; CD8.2 6.85,25.32 v1(6.43,24.9) ; v1(14.73,12.45) 15.17,12.45 CD26.2 ; CD21.2 10.4,25.32 v1(10.62,25.1) ; v1(6.4,22.37) 6.16,22.37 CD20.2 6.01,21.72 v1(6.38,21.72) ; CD6.2 12.83,21.81 v1(12.83,21.68) ; v1(4.8,11.9) 4.8,11.89 CD23.2 ; v1(14.61,18.03) 14.57,18.07 CD5.2 13.57,18.07 v1(13.47,17.97) ; v1(14.41,13.49) 14.61,13.69 CD22.2
  BOTTOM w0.406: CD9.2 16.81,15.45 v1(16.51,15.75) ; v1(13.59,9.33) 13.76,9.5 CD4.2 13.71,9.96 13.71,10.26 v1(13.49,10.48)
  vias: v1(0.66,20.19) v1(0.76,21.97) v1(0.76,19.05) v1(0.76,16) v1(0.76,13.08) v1(0.76,9.91) v1(0.89,24.77) v1(0.89,17.53) v1(0.89,5.97) v1(1.02,28.7) v1(1.02,22.86) v1(1.4,1.02) v1(1.52,26.42) v1(1.52,21.95) v1(2.03,4.95) v1(2.16,24.77) v1(2.29,28.57) v1(3.05,26.92) v1(3.84,18.94) v1(4.26,17.4) v1(4.32,28.7) v1(4.57,2.79) v1(6.35,0.89) v1(6.42,13.83) v1(8,28.96) v1(9.02,17.43) v1(9.65,0.63) v1(10.48,16.5) v1(10.5,18.2) v1(10.74,9.97) v1(10.92,28.96) v1(13.21,0.51) v1(14.35,28.96) v1(14.76,6.45) v1(15.24,7.39) v1(15.77,6.15) v1(16.08,7.01) v1(16.43,8.79) v1(16.38,0.51) v1(17.53,28.96) v1(17.86,11.94) v1(17.96,8.74) v1(19.23,8.41) v1(20.07,28.32) v1(20.04,10.39) v1(20.57,0.51) v1(20.85,19.43) v1(21.72,26.16) v1(23.88,24.77) v1(24.26,28.96) v1(24.38,26.42) v1(25.25,8.97) v1(25.27,0.63) v1(25.53,24.64) v1(27.05,2.29) v1(27.18,26.54) v1(27.18,22.61) v1(27.15,20.78) v1(27.81,1.02) v1(28.73,19.71) v1(29.46,24.64) v1(29.46,0.76) v1(29.72,20.19) v1(29.9,4.55) v1(30.1,28.96) v1(30.15,13.67) v1(30.61,2.67) v1(31.12,26.16) v1(31.24,22.73) v1(31.75,1.78) v1(31.8,7.19) v1(32.05,12.65) v1(32.07,10.11) v1(32.51,24) v1(32.61,12.67) v1(33.4,0.89) v1(33.66,19.68) v1(33.91,2.54) v1(34.04,24.64) v1(34.16,28.96) v1(34.29,22.35) v1(34.92,26.8) v1(35.15,16.51) v1(35.18,22.61) v1(35.31,24.64) v1(35.31,0.63) v1(35.38,8.41) v1(35.56,18.54) v1(35.51,4.57) v1(35.64,13.39) v1(35.64,11.48) v1(35.69,20.95) v1(35.81,15.62)
VCC-DRAM: length 55.2
  TOP w0.175: UD1.F10 6.47,14.23 6.15,14.55 5.05,14.55 4.6,15 v1(4.47,15)
  TOP w0.203: 11.76,10.06 11.59,10.23 11.59,10.84 11.58,10.85 UD1.A4
  TOP w0.254: v1(10.49,12.61) 10.42,12.54 10.42,11.99 UD1.B5 ; 15.37,19.26 15.03,19.26 v1(14.96,19.33) 15.01,19.38 15.01,19.66 ; 12.79,18.59 12.82,18.59 12.82,18.19 13.03,17.98 13.03,17.57 12.66,17.21 12.57,17.21 ; UD1.W12 5.17,22.68 v1(4.7,22.68) ; v1(8.88,21.43) 8.85,21.4 8.41,21.4 UD1.U8 ; v1(6.39,24.31) 6.72,23.98 UD1.AA10 ; UD1.A9 7.49,10.89 v1(7.49,10.29) ; UD1.R12 4.33,20.08 v1(4.24,19.99) ; 10.06,18.49 v1(10.01,18.49) ; 10.06,18.49 10.06,17.31 v1(10.09,17.28) ; 10.06,18.49 v1(10.06,19.01) ; v1(10.34,14.29) 10.43,14.29 10.44,14.27 10.73,14.27 UD1.F5 ; v1(11.25,24.95) 11.57,24.63 UD1.AB4 10.93,23.98 UD1.AA5 10.78,24 v1(10.37,24.41) ; v1(27.53,9.43) U1.L13 27.86,9.77 v1(27.54,10.09) U1.L12 27.86,10.42 v1(27.54,10.74) U1.L11 27.86,11.07 v1(27.54,11.39) U1.L10 27.86,11.72 v1(27.54,12.04) U1.L9 ; UD1.K3 12.56,17.01 12.56,17.21 12.57,17.21 ; v1(4.36,19.09) v1(4.86,19.09) UD1.N12 5.18,18.76 5.11,18.69 5.11,18.04 4.7,17.64 4.7,17.09 4.7,17.07 v1(4.46,16.83) 4.46,16.83 UD1.K12 ; v1(4.45,15.78) 4.45,15.78 4.53,15.7 5.01,15.7 UD1.H12 ; v1(6.4,19.17) 6.4,19.2 6.39,19.2 6.39,19.16 UD1.N10 6.52,18.51 6.52,17.67 6.38,17.53 6.38,17.17 6.63,16.92 6.64,16.92 6.73,16.83 UD1.K10 ; UD1.AB9 7.58,25.02 v1(7.74,25.18) ; 12.57,17.21 12.57,17.22 12.57,17.22 v1(12.57,17.22) ; v1(12.61,9.26) 12.56,9.26 11.76,10.06 ; v1(14.56,18.57) 14.35,18.78 UD1.N1 ; RD1.2 15.61,17.02 v1(14.91,17.02) ; UD1.F3 v1(12.74,14.59)
  TOP w0.27: 12.77,18.59 12.7,18.59 12.51,18.78 UD1.N3 ; 12.77,18.59 v1(12.77,18.57) ; 12.77,18.59 12.79,18.59 ; v1(14.91,17.02) 14.72,16.83 UD1.K1 ; RD2.2 15.37,19.26 ; UD1.U5 10.55,21.6 v1(10.4,21.6) ; v1(10.39,20.52) 10.39,20.47 UD1.R5 ; UD1.R8 8.85,20.08 9.12,20.35 v1(9.12,20.42) ; UD1.AA3 12.06,24.3 11.91,24.3 UD1.AB4 ; UD1.D8 8.76,12.93 v1(8.82,12.87) ; v1(10.09,17.28) 10.04,17.23 10.04,15.83 10.33,15.54 10.63,15.54 10.64,15.54 10.77,15.54 UD1.H5 ; UD1.U10 7.07,21.09 v1(7.2,21.09) ; v1(10.39,23.06) 10.42,23.06 10.42,23.06 10.42,23.06 10.42,23.03 UD1.W5 ; UD1.AA8 v1(9.35,23.98) ; v1(8.82,11.63) UD1.B8 ; UD1.D5 10.49,12.63 v1(10.49,12.61) ; UD1.B3 12.38,11.59 12.75,11.22 12.75,10.78 v1(12.85,10.68) ; v1(12.73,21.11) 12.73,21.13 12.63,21.13 UD1.U3 ; v1(4.84,12.58) 4.84,12.58 UD1.D12 ; UD1.A9 7.46,10.98 6.81,11.63 UD1.B10 ; v1(14.55,12.95) 14.55,12.94 14.53,12.94 14.52,12.94 13.99,12.94 UD1.D1 ; 15.01,19.66 14.6,20.08 UD1.R1 ; UD1.F8 8.42,14.18 8.72,14.18 8.8,14.11 v1(8.81,14.11) ; v1(9.02,15.82) 9.03,15.82 8.74,15.53 UD1.H8 ; UD1.W1 14.83,22.68 14.97,22.53 v1(14.98,22.53) ; UD1.H1 14.13,15.68 14.74,15.68 v1(14.84,15.78) ; UD1.W8 v1(9.34,22.68)
  BOTTOM w0.254: v1(10.49,12.61) 10.79,12.31 RD3.2
  BOTTOM w0.381: v1(6.39,24.31) 6.95,24.31 CD8.1 ; CD6.1 13.33,21.11 v1(12.73,21.11) ; CD21.1 9.83,24.41 v1(10.37,24.41) ; v1(8.88,21.43) 9.52,21.43
  vias: v1(4.04,24.03) v1(3.99,23.14) v1(4.09,24.89)
VDD18-DRAM: length 46.2
  TOP w0.305: U1.L14 27.86,9.1 v1(28.19,8.78)
  TOP w0.381: v1(1.42,19.71) 1.48,19.77 RD9.1
  BOTTOM w0.305: v1(28.19,8.78) 28.02,8.62 CD19.1 CD18.1
  BOTTOM w0.381: CD18.1 28.02,5.44 23.6,1.02 10.77,1.02 1.75,10.03 1.75,19.38 v1(1.42,19.71)
VDD18-LPDDR: length 49.8
  TOP w0.175: 9.64,15.24 8.91,15.24 8.87,15.2 8.09,15.2 7.76,14.88 UD1.G9 ; UD1.T4 11.26,21.05 v1(10.29,21.05) ; UD1.G4 11.29,14.88 10.97,15.2 10.51,15.2 10.5,15.21 9.67,15.21
  TOP w0.254: v1(15.66,14.46) 15.57,14.38 15.24,14.38 15.09,14.23 UD1.F1 ; 9.5,19.31 9.5,15.39 9.67,15.21 ; 9.5,19.31 v1(9.83,19.63) ; 9.5,19.31 9.5,19.37 v1(9.14,19.73) ; v1(7.27,20.41) 7.27,20.43 7.28,20.43 UD1.T9
  TOP w0.27: v1(4.27,21.12) 4.92,21.12 UD1.U12 ; v1(14.98,20.66) 14.34,21.3 14.06,21.3 UD1.U1 ; UD1.F12 5.17,14.22 4.69,14.22 v1(4.45,14.46)
  TOP w0.406: RD9.2 2.33,20.11 2.05,19.83 2.05,14.69 v1(2.26,14.48) ; RD9.2 2.93,20.32 v1(3.73,21.12) v1(4.27,21.12) ; RD9.2 CD10.1
  L3 w0.254: v1(10.29,21.05) 9.83,20.59 9.83,20.07 ; 9.83,20.07 9.49,19.73 ; 9.83,20.07 10.16,19.73 ; 9.83,20.07 v1(9.83,19.63)
  L3 w0.406: v1(14.98,20.66) 14.98,20.03 15.47,19.54 15.47,16.1 v1(15.88,15.7) ; v1(7.27,20.41) 7.27,19.94 ; v1(2.26,14.48) 2.28,14.46 v1(4.45,14.46)
  L3 w0.508: v1(14.98,20.66) 14.69,20.66 13.76,19.73 9.92,19.73 v1(9.83,19.63) 9.73,19.73 v1(9.14,19.73) 7.48,19.73 7.27,19.94 5.33,19.94 4.27,21.01 v1(4.27,21.12) v1(3.73,21.12)
  BOTTOM w0.254: v1(14.98,20.66) 14.98,20.68
  BOTTOM w0.406: v1(15.88,15.7) 15.88,15.2 CD9.1 15.96,14.76 v1(15.66,14.46)
VDD-CPU: length 2.7
  TOP w0.254: U1.J11 29.16,11.05 v1(29.48,10.74) ; U1.J10 v1(29.48,11.39) ; U1.J8 v1(29.48,12.69) ; U1.H9 v1(30.13,12.04) ; U1.H8 v1(30.13,12.69) ; U1.J9 v1(29.48,12.04)
VDD-GPU: length 1.8
  TOP w0.254: U1.F9 v1(31.43,12.04) ; U1.G8 v1(30.78,12.69) ; U1.F10 v1(31.43,11.39) ; U1.G9 v1(30.78,12.04)
VDD-SYS: length 2.7
  TOP w0.254: U1.G11 v1(30.78,10.74) ; U1.G12 v1(30.78,10.09) ; U1.F12 v1(31.43,10.09) ; U1.G10 v1(30.78,11.39) ; U1.F11 v1(31.43,10.74) ; v1(31.45,9.45) 31.42,9.45 31.11,9.76 U1.F13
SA0: length 37
  TOP w0.102: UD1.R2 13.18,19.85 13.69,19.34 13.69,18.55 14.1,18.14 14.1,17.66 v1(14.27,17.49) 14.27,17.44 13.95,17.11 13.86,17.11 13.69,16.94 13.69,16.23 13.23,15.76 13.23,15.57 UD1.H2 ; U1.U17 23.85,7.16 22.61,5.91 22.61,5.11 21.97,4.47 20.54,4.47 20.14,4.87 v1(20.09,4.87)
  L3 w0.102: v1(14.27,17.49) 14.27,17.37 14.01,17.11 14.01,12.42 12.25,10.66 12.25,8.91 12.4,8.76 12.98,8.76 13.16,8.59 13.16,5.88 14.16,4.87 16.43,4.87 16.56,5 16.56,5.56 16.66,5.66 16.99,5.66 17.09,5.56 17.09,4.98 17.2,4.87 17.35,4.87 17.45,4.98 17.45,5.56 17.55,5.66 17.7,5.66 17.81,5.56 17.81,4.98 17.91,4.87 18.06,4.87 18.16,4.98 18.16,5.56 18.26,5.66 18.41,5.66 18.52,5.56 18.52,4.98 18.62,4.87 18.77,4.87 18.87,4.98 18.87,5.56 18.97,5.66 19.96,5.66 20.09,5.54 v1(20.09,4.87)
SA1: length 34.8
  TOP w0.102: UD1.P2 13.47,19.14 13.47,18.48 13.9,18.05 13.9,17.59 13.76,17.45 v1(13.74,17.45) 13.74,17.31 13.47,17.04 13.47,16.46 UD1.J2 ; U1.V17 23.31,7.12 22.25,6.06 22.25,5.26 21.82,4.83 20.69,4.83 v1(20.62,4.9)
  L3 w0.102: v1(13.74,17.45) 13.74,17.35 13.65,17.26 13.65,13.45 12.45,12.24 12.45,12.1 12.7,11.85 12.7,11.71 12.59,11.6 12.45,11.6 12.2,11.85 12.05,11.85 11.89,11.69 11.89,8.41 11.99,8.31 12.7,8.31 12.8,8.2 12.8,8.05 12.7,7.95 11.99,7.95 11.89,7.85 11.89,7.7 11.99,7.59 12.7,7.59 12.8,7.49 12.8,7.34 12.7,7.24 11.99,7.24 11.89,7.14 11.89,6.64 14.01,4.52 19.17,4.52 19.27,4.62 19.27,5.21 19.37,5.31 19.52,5.31 19.62,5.21 19.62,4.62 19.72,4.52 20.24,4.52 v1(20.62,4.9)
SA2: length 34.8
  TOP w0.102: U1.T21 24.17,4.11 23.93,4.11 v1(23.92,4.11) ; UD1.R9 7.27,19.77 7.27,17.35 v1(7.34,17.28) 7.29,17.23 7.29,15.81 UD1.H9
  L3 w0.102: v1(7.34,17.28) 7.17,17.11 7.17,11.29 6.56,10.68 6.56,9.14 12.99,2.71 21.07,2.71 22.47,4.11 v1(23.92,4.11)
SA3: length 39.6
  TOP w0.102: UD1.R10 7.07,19.79 7.07,17.61 v1(6.81,17.35) 6.81,17.3 7.07,17.04 7.07,15.81 UD1.H10 ; U1.R20 24.97,4.92 24.96,4.92 v1(24.93,4.89)
  L3 w0.102: v1(6.81,17.35) 6.81,17.3 6.82,17.29 6.82,14.84 6.72,14.74 6.55,14.74 6.45,14.63 6.45,14.48 6.55,14.38 6.72,14.38 6.82,14.28 6.82,13.29 6.72,13.19 6.5,13.19 6.42,13.11 6.42,12.92 6.5,12.83 6.72,12.83 6.82,12.73 6.82,12.58 6.72,12.48 6.5,12.48 6.42,12.4 6.42,12.21 6.5,12.12 6.72,12.12 6.82,12.02 6.82,11.44 6.2,10.82 6.2,10.59 6.1,10.49 5.94,10.49 5.84,10.39 5.84,10.24 5.94,10.14 6.1,10.14 6.2,10.04 6.2,9.88 6.1,9.78 5.94,9.78 5.84,9.68 5.84,9.53 5.94,9.43 6.1,9.43 6.2,9.32 6.2,8.99 12.84,2.35 21.22,2.35 22.62,3.75 24.07,3.75 24.41,4.09 24.41,4.47 24.49,4.55 24.86,4.55 24.93,4.62 v1(24.93,4.89)
SA4: length 41.3
  TOP w0.102: UD1.H11 5.98,15.61 5.47,16.12 5.47,17.04 5.22,17.29 5.22,17.33 5.14,17.4 ; v1(5.13,17.41) 5.14,17.4 ; v1(25.66,6.1) 25.65,6.1 25.65,6.12 U1.R18 ; 5.14,17.4 5.39,17.65 5.39,18.57 5.47,18.66 5.47,19.42 5.98,19.94 UD1.R11
  L3 w0.102: v1(25.66,6.1) 25.66,4.32 24.37,3.04 24.08,3.04 22.91,3.04 21.43,1.56 12.55,1.56 5.1,9.02 5.1,11.26 5.32,11.48 5.71,11.86 5.71,14.4 5.16,14.95 5.16,17.38 v1(5.13,17.41)
SA5: length 40.1
  TOP w0.102: U1.T16 25.49,6.93 v1(25.53,6.93) ; UD1.J11 5.67,16.48 5.67,17.12 5.67,17.12 5.67,17.37 v1(5.67,17.37) 5.67,17.37 5.67,17.38 5.59,17.46 5.59,18.49 5.67,18.57 5.67,19.32 5.77,19.43 UD1.P11
  L3 w0.102: v1(25.53,6.93) 25.3,6.71 25.3,4.47 24.22,3.4 22.77,3.4 21.29,1.92 12.7,1.92 5.45,9.16 5.45,11.11 6.06,11.72 6.06,15.59 5.67,15.98 v1(5.67,17.37)
SCKE0: length 32.7
  TOP w0.102: U1.V15 23.04,8.19 23.04,7.82 21.87,6.66 21.87,5.61 v1(21.77,5.52) ; UD1.P4 11.89,19.12 11.89,18.55 12.11,18.33 12.11,17.83 12.06,17.79 v1(12.06,17.78) 12.01,17.73 12.01,17.44 12,17.44 12,17.16 11.89,17.05 11.87,17.03 11.87,16.46 UD1.J4
  L3 w0.102: v1(12.06,17.78) 12.06,17.78 12.06,15.69 10.79,14.43 10.79,13.52 10.13,12.86 10.13,9.94 10.51,9.56 10.51,6.92 13.66,3.77 20.59,3.77 21.77,4.95 21.77,5.51 v1(21.77,5.52)
SCKE1: length 38.2
  TOP w0.102: v1(26.24,9.44) 26.21,9.47 26.21,9.47 U1.P13 ; UD1.J5 11.07,16.47 11.07,17.43 10.94,17.57 v1(10.93,17.57) 10.93,17.57 10.86,17.64 10.86,18.26 11.07,18.47 11.07,19.13 UD1.P5
  L3 w0.102: v1(26.24,9.44) 26.24,8.29 24.74,6.78 24.74,5.83 24.03,5.13 22.95,5.13 20.88,3.06 13.14,3.06 8.9,7.3 8.9,10.22 9.41,10.73 9.41,14.94 10.93,16.45 v1(10.93,17.57)
SCKN: length 47.7
  TOP w0.097: v1(3.81,17.68) 3.86,17.73 3.86,17.86 3.65,18.07 3.38,18.07 3.3,17.99 3.3,7.34 8.18,2.46 16.43,2.46 19.65,5.68 20.1,5.68 20.17,5.75 20.17,5.94 19.89,6.22 19.89,6.36 20.05,6.52 CD27.2 20.2,6.68 20.34,6.83 20.5,6.83 20.8,6.52 20.95,6.52 21.07,6.64 21.07,7.28 22.87,9.08 23.93,9.08 U1.U14 ; UD1.J9 7.77,16.18 7.87,16.27 7.87,17.02 8.41,17.56 8.41,17.75 8.29,17.86 v1(8.19,17.86) 8.32,18 8.32,18.13 7.87,18.59 7.87,19.33 7.77,19.43 UD1.P9
  L3 w0.097: v1(8.19,17.86) 8.21,17.89 8.21,18.02 8.05,18.19 5.45,18.19 5.34,18.07 4,18.07 3.8,17.87 3.8,17.74 3.81,17.73 v1(3.81,17.68)
SCKP: length 48.2
  TOP w0.097: UD1.P8 8.06,19.11 8.06,18.67 8.78,17.96 v1(8.78,17.91) 8.61,17.74 8.61,17.46 8.1,16.94 8.1,16.46 UD1.J8 ; U1.T14 24.26,8.76 23,8.76 21.39,7.15 21.39,6.51 CD27.1 20.24,5.36 19.78,5.36 16.57,2.15 8.05,2.15 2.98,7.21 2.98,18.12 3.25,18.39 v1(3.83,18.39)
  L3 w0.097: v1(3.83,18.39) 5.21,18.39 5.32,18.5 8.18,18.5 v1(8.78,17.91)
SCS0: length 41.8
  TOP w0.102: UD1.H4 11.29,15.81 11.29,17.95 v1(11.23,18.01) 11.25,18.01 11.29,18.05 11.29,19.79 UD1.R4 ; v1(24.29,6.19) 24.3,6.2 U1.T18
  L3 w0.102: v1(24.29,6.19) 23.57,6.91 23.16,6.91 22.56,6.3 22.56,5.24 20.74,3.42 13.28,3.42 9.34,7.36 9.34,7.5 9.44,7.6 10.07,7.6 10.16,7.69 10.16,7.87 10.06,7.96 9.39,7.96 9.3,8.05 9.3,8.2 9.42,8.32 10.08,8.32 10.16,8.39 10.16,8.6 10.08,8.67 9.88,8.67 9.77,8.77 9.77,8.99 9.67,9.09 9.36,9.09 9.25,9.19 9.25,9.32 9.36,9.42 9.7,9.42 9.77,9.5 9.77,9.68 9.67,9.78 9.35,9.78 9.25,9.88 9.25,10.05 9.35,10.14 9.62,10.14 9.77,10.29 9.77,14.8 10.38,15.4 10.53,15.4 10.8,15.13 10.94,15.13 11.05,15.24 11.05,15.38 10.78,15.66 10.78,15.8 10.89,15.91 11.03,15.91 11.3,15.64 11.44,15.64 11.55,15.74 11.55,15.89 11.28,16.16 11.28,16.3 11.61,16.63 11.61,16.82 11.51,16.92 11.39,16.92 11.28,17.02 11.28,17.96 v1(11.23,18.01)
SCS1: length 42.1
  TOP w0.102: UD1.R3 12.09,19.79 12.09,18.63 12.31,18.41 12.31,18.08 v1(12.59,17.8) 12.59,17.75 12.21,17.37 12.21,17.36 12.21,17.35 12.21,17.07 12.09,16.95 12.09,15.81 UD1.H3 ; U1.P15 25.59,8.14 v1(25.59,8.14)
  L3 w0.102: v1(25.59,8.14) 24.72,7.27 24.38,7.27 24.28,7.37 24.28,7.59 24.18,7.7 24.03,7.7 23.93,7.59 23.93,7.37 23.82,7.27 22.88,7.27 22.73,7.42 22.59,7.42 22.48,7.31 22.48,7.17 22.63,7.02 22.63,6.88 22.52,6.77 22.38,6.77 22.23,6.92 22.08,6.92 21.98,6.81 21.98,6.67 22.13,6.52 22.13,6.37 22.02,6.27 21.87,6.27 21.72,6.42 21.58,6.42 21.47,6.31 21.47,6.17 21.62,6.02 21.62,5.87 21.5,5.75 21.39,5.75 21.3,5.84 21.16,5.84 21.06,5.73 21.06,4.74 20.44,4.13 13.8,4.13 10.93,7.01 10.93,7.17 11,7.24 11.46,7.24 11.54,7.32 11.54,7.49 11.43,7.59 10.97,7.59 10.87,7.69 10.87,7.85 10.97,7.95 11.43,7.95 11.54,8.05 11.54,8.2 11.43,8.3 10.97,8.3 10.87,8.4 10.87,8.56 10.97,8.66 11.43,8.66 11.54,8.76 11.54,8.91 11.43,9.01 10.97,9.01 10.87,9.12 10.87,9.27 10.97,9.37 11.43,9.37 11.54,9.47 11.54,11.99 11.99,12.44 11.99,12.98 13.1,14.09 13.1,14.97 12.42,15.65 12.42,16.56 12.92,17.06 12.92,17.47 v1(12.59,17.8)
SDQ0: length 35.3
  TOP w0.102: U1.N3 26.56,16.4 26.87,16.7 26.87,19.86 18.37,28.35 7.8,28.35 4.6,25.14 4.6,24.15 5.06,23.69 5.22,23.69 5.47,23.44 5.47,21.89 UD1.U11
SDQ1: length 31.1
  TOP w0.102: U1.U4 22.99,15.61 22.98,15.62 22.25,15.62 TDP2.1 19.94,17.94 v1(19.94,20.37) ; UD1.U9 7.95,21.74 v1(7.95,21.76)
  L3 w0.102: v1(19.94,20.37) 19.94,22.05 18.57,23.42 18.57,23.56 18.87,23.86 18.87,24.01 18.77,24.12 18.62,24.12 18.31,23.81 18.17,23.81 16.64,25.34 16.64,25.73 16.47,25.9 8.89,25.9 8.64,25.65 8.64,24.71 8.38,24.46 8.15,24.46 8.05,24.36 8.05,24.21 8.15,24.1 8.71,24.1 8.81,24 8.81,23.8 8.71,23.7 7.98,23.7 7.9,23.62 7.9,23.42 7.98,23.34 8.36,23.34 8.46,23.24 8.46,23.01 8.64,22.83 8.89,22.83 8.97,22.76 8.97,22.53 8.86,22.43 8.59,22.43 8.46,22.3 8.46,22.12 8.1,21.76 v1(7.95,21.76)
SDQ2: length 32.6
  TOP w0.102: U1.N2 26.51,16.96 26.51,19.71 18.23,27.99 7.95,27.99 4.89,24.93 4.89,24.51 5.06,24.34 5.22,24.34 5.49,24.07 5.49,23.77 5.69,23.57 5.69,22.32 UD1.V11
SDQ3: length 31.2
  TOP w0.102: v1(7.9,22.35) UD1.V9 ; U1.T4 24.39,15.61 24.08,15.93 23.03,15.93 22.98,15.98 22.43,15.98 20.29,18.11 20.29,19.92 v1(20.35,19.97)
  L3 w0.102: v1(7.9,22.35) 7.54,22.71 7.54,24.36 8.23,25.04 8.23,25.76 8.73,26.26 17.13,26.26 17.29,26.1 17.29,25.95 17,25.66 17,25.52 17.11,25.41 17.25,25.41 17.54,25.7 17.69,25.7 17.79,25.59 17.79,25.45 17.5,25.16 17.5,25.02 17.61,24.91 17.75,24.91 18.04,25.2 18.19,25.2 18.3,25.09 18.3,24.95 18.01,24.66 18.01,24.51 18.11,24.41 18.26,24.41 18.55,24.7 18.69,24.7 19.41,23.98 19.41,23.09 19.61,22.89 19.61,22.88 20.29,22.2 20.29,20.03 v1(20.35,19.97)
SDQ4: length 29.9
  TOP w0.102: U1.U3 23.66,16.56 23.11,16.56 22.98,16.69 22.81,16.69 21.74,17.76 v1(21.74,19.25) ; UD1.Y9 7.87,23.61 7.87,24.19 8.09,24.42 8.09,24.74 8.7,25.35 8.91,25.35 9.27,25.7 14.86,25.7 18.16,22.4 20.58,22.4 23.06,19.92 v1(23.06,19.78)
  L3 w0.102: v1(23.06,19.78) 22.98,19.78 22.88,19.88 22.88,20.51 22.79,20.6 22.63,20.6 22.52,20.5 22.52,19.88 22.42,19.78 22.26,19.78 22.12,19.91 22.12,21.18 22.02,21.29 21.84,21.29 21.74,21.18 v1(21.74,19.25)
SDQ5: length 31.2
  TOP w0.102: U1.P1 25.91,18.13 25.15,18.9 25.15,20.07 20.57,24.64 20.32,24.64 20.1,24.42 19.96,24.42 19.85,24.53 19.85,24.67 20.07,24.89 20.07,25.04 19.97,25.14 19.82,25.14 19.6,24.92 19.45,24.92 19.35,25.03 19.35,25.17 19.57,25.4 19.57,25.54 19.46,25.65 19.32,25.65 19.09,25.42 18.95,25.42 18.84,25.53 18.84,25.67 19.07,25.9 19.07,26.04 18.96,26.15 18.82,26.15 18.59,25.93 18.45,25.93 18.34,26.03 18.34,26.18 18.56,26.4 18.56,26.55 18.46,26.65 18.31,26.65 18.09,26.43 17.95,26.43 17.84,26.54 17.84,26.68 18.06,26.91 18.06,27.05 17.85,27.26 8.23,27.26 6.32,25.35 6.25,25.35 5.69,24.79 5.69,24.48 5.98,24.2 UD1.AA11
SDQ6: length 31.1
  TOP w0.102: UD1.AA9 7.58,24.19 7.89,24.5 7.89,24.83 9.12,26.06 16.61,26.06 16.86,25.81 16.86,25.67 16.21,25.03 16.21,24.88 16.32,24.77 16.47,24.77 17.11,25.42 17.25,25.42 17.36,25.31 17.36,25.17 16.72,24.52 16.72,24.38 16.83,24.27 16.97,24.27 17.61,24.92 17.76,24.92 17.86,24.81 17.86,24.66 17.22,24.02 17.22,23.88 17.33,23.77 17.47,23.77 18.12,24.41 18.26,24.41 18.37,24.3 18.37,24.16 17.72,23.52 17.72,23.37 17.83,23.27 17.98,23.27 18.62,23.91 18.76,23.91 19.91,22.76 20.73,22.76 23.93,19.56 23.93,18.11 24.3,17.75 24.3,17.41 24.61,17.09 U1.T2
SDQ7: length 31.6
  TOP w0.102: U1.P2 26.11,16.91 26.22,17.02 26.22,19.52 26.11,19.63 25.97,19.63 25.87,19.52 25.87,18.96 25.77,18.86 25.62,18.86 25.52,18.96 25.52,20.19 18.08,27.64 8.1,27.64 5.47,25 5.47,24.42 5.69,24.2 5.69,23.86 5.98,23.57 UD1.Y11
SDQ8: length 23
  TOP w0.102: UD1.Y4 v1(11.26,23) ; U1.P5 v1(26.23,15.28)
  L3 w0.102: v1(11.26,23) 11.29,23 13.08,24.79 15.91,24.79 18.92,21.78 18.92,20.02 20.5,18.44 24.89,18.44 26.62,16.71 26.62,15.67 v1(26.23,15.28)
SDQ9: length 22.1
  TOP w0.102: U1.V3 23.24,16.33 22.67,16.33 21.34,17.66 21.34,19.86 20.17,21.03 19.48,21.03 19.38,20.93 19.38,19.91 19.28,19.81 19.13,19.81 19.02,19.91 19.02,20.93 18.92,21.03 18.77,21.03 18.67,20.93 18.67,19.91 18.57,19.81 18.41,19.81 18.31,19.91 18.31,20.93 18.21,21.03 18.06,21.03 17.96,20.93 17.96,19.91 17.86,19.81 17.7,19.81 17.6,19.91 17.6,20.93 17.5,21.03 17.27,21.03 17.11,21.2 17.11,21.53 16.66,21.97 15.98,21.97 15.88,22.07 15.88,22.58 15.78,22.68 15.63,22.68 15.52,22.58 15.52,22.07 15.42,21.97 14.99,21.97 14.61,22.35 13.79,22.35 13.47,22.03 UD1.V2
SDQ10: length 19.3
  TOP w0.102: UD1.Y2 v1(13.51,23.65) ; v1(25.58,15.93) 25.6,15.92 25.61,15.92 U1.P4
  L3 w0.102: v1(25.58,15.93) 23.92,17.6 20.26,17.6 18.11,19.75 18.11,20.07 18,20.18 17.81,20.18 17.7,20.28 17.7,20.43 17.81,20.53 18,20.53 18.11,20.63 18.11,20.79 18,20.89 17.81,20.89 17.7,20.99 17.7,21.14 17.81,21.24 18,21.24 18.11,21.34 18.11,21.57 15.63,24.05 15.32,24.05 15.22,23.95 15.22,23.73 15.12,23.63 14.96,23.63 14.86,23.73 14.86,23.95 14.76,24.05 13.91,24.05 v1(13.51,23.65)
SDQ11: length 19
  TOP w0.102: v1(11.89,22.34) 11.89,22.33 11.88,22.33 UD1.V4 ; v1(24.94,15.29) 24.99,15.33 24.99,15.34 U1.R4
  L3 w0.102: v1(11.89,22.34) 12.03,22.34 12.6,22.91 15.53,22.91 15.96,22.49 15.96,22.28 15.82,22.15 15.82,21.95 15.93,21.84 16.08,21.84 16.23,21.99 16.45,21.99 16.86,21.59 16.86,19.89 19.88,16.86 22.99,16.86 24.05,15.8 24.43,15.8 v1(24.94,15.29)
SDQ12: length 19.6
  TOP w0.102: UD1.U2 13.22,21.38 13.51,21.67 14.22,21.67 14.27,21.61 15.57,21.61 v1(15.98,21.21) ; U1.R6 25.53,14.58 25.53,14.58 v1(25.58,14.64)
  L3 w0.102: v1(15.98,21.21) 16.5,20.68 16.5,19.74 17.88,18.36 17.88,17.74 19.5,16.13 19.75,16.13 19.85,16.03 19.85,15.65 19.95,15.54 20.1,15.54 20.2,15.65 20.2,16.03 20.31,16.13 20.46,16.13 20.56,16.03 20.56,15.65 20.66,15.54 20.81,15.54 20.92,15.65 20.92,16.03 21.02,16.13 21.17,16.13 21.27,16.03 21.27,15.65 21.37,15.54 21.53,15.54 21.63,15.65 21.63,16.03 21.73,16.13 23.22,16.13 24.44,14.91 25.31,14.91 v1(25.58,14.64)
SDQ13: length 19.1
  TOP w0.102: v1(26.24,15.94) 26.56,15.62 U1.N4 ; UD1.AA2 v1(13.51,24.3)
  L3 w0.102: v1(26.24,15.94) 26.11,15.94 25.09,16.95 25.09,17.1 25.34,17.34 25.34,17.49 25.23,17.6 25.09,17.6 24.84,17.35 24.69,17.35 24.08,17.96 20.4,17.96 18.46,19.9 18.46,21.72 15.78,24.41 13.76,24.41 13.65,24.3 v1(13.51,24.3)
SDQ14: length 21.2
  TOP w0.102: U1.P6 26.23,14.63 v1(26.24,14.63) ; UD1.U4 v1(11.91,21.05)
  L3 w0.102: v1(11.91,21.05) 12.2,20.75 13.59,20.75 14.09,21.26 14.77,21.26 14.87,21.36 14.87,21.92 14.98,22.02 15.13,22.02 15.23,21.92 15.23,21.36 16.15,20.45 16.15,19.59 17.53,18.21 17.53,17.47 19.8,15.19 21.67,15.19 22.16,15.67 23.18,15.67 24.29,14.55 25.16,14.55 25.44,14.28 25.89,14.28 v1(26.24,14.63)
SDQ15: length 23.3
  TOP w0.102: v1(26.91,15.28) 26.89,15.28 U1.N5 ; UD1.AA4 v1(11.26,23.65)
  L3 w0.102: v1(26.91,15.28) 26.97,15.35 26.97,16.86 25.03,18.8 20.64,18.8 19.28,20.16 19.28,21.92 16.06,25.14 12.93,25.14 11.44,23.65 v1(11.26,23.65)
SDQ16: length 19.8
  TOP w0.102: v1(15.6,9.1) 15.42,9.1 14.8,8.47 12.64,8.47 TDP7.1 12.61,8.47 12.23,8.47 11.66,9.05 11.66,9.42 11.14,9.95 11.14,10.65 11.09,10.7 11.09,11.73 11.58,12.23 UD1.C4 ; v1(18.95,10.19) 18.98,10.19 19.54,10.76 21.65,10.76 TDP31.1 21.68,10.76 24.31,10.76 U1.T11
  L3 w0.102: v1(18.95,10.19) 18.95,10.19 18.68,9.93 18.53,9.93 18.3,10.16 18.16,10.16 18.05,10.05 18.05,9.91 18.28,9.67 18.28,9.53 17.85,9.1 17.33,9.1 17.23,9.2 17.23,9.38 17.13,9.48 16.98,9.48 16.88,9.38 16.88,9.2 16.78,9.1 16.62,9.1 16.52,9.2 16.52,9.38 16.42,9.48 16.27,9.48 16.17,9.38 16.17,9.2 16.06,9.1 v1(15.6,9.1)
SDQ17: length 21.9
  TOP w0.102: v1(16.08,8.33) 15.51,7.76 11.87,7.76 10.5,9.14 10.5,9.27 9.79,9.98 9.79,13.57 10.13,13.92 11.27,13.92 UD1.F4 ; v1(18.91,9.1) 19.84,10.03 23.36,10.03 23.74,10.41 U1.U12
  L3 w0.102: v1(18.91,9.1) 18.14,8.33 v1(16.08,8.33)
SDQ18: length 21.2
  TOP w0.102: v1(19.45,9.09) 19.45,9.13 19.99,9.68 23.44,9.68 23.88,10.11 24.31,10.11 U1.T12 ; UD1.E4 11.19,13.58 10.87,13.26 10.54,13.26 9.99,12.71 9.99,10.15 12.02,8.12 15.24,8.12 v1(15.35,8.23)
  L3 w0.102: v1(19.45,9.09) 19.41,9.09 19.05,8.74 18.29,7.98 15.6,7.98 v1(15.35,8.23)
SDQ19: length 20.6
  TOP w0.102: UD1.B4 11.58,11.4 11.29,11.11 11.29,10.78 11.34,10.74 11.34,10.03 11.99,9.38 11.99,9.22 12.38,8.83 14.13,8.83 14.35,9.05 14.5,9.05 14.57,8.98 14.72,8.98 14.83,9.09 14.83,9.23 14.75,9.31 14.75,9.45 14.86,9.56 15,9.56 15.08,9.48 15.22,9.48 15.33,9.59 15.33,9.73 15.25,9.81 15.25,9.95 15.41,10.11 15.56,10.11 16.09,9.58 16.24,9.58 16.34,9.69 16.34,9.83 15.81,10.37 15.81,10.51 15.92,10.62 16.06,10.62 16.59,10.08 16.74,10.08 16.85,10.19 16.85,10.34 16.31,10.87 16.31,11.01 17.67,12.37 20.77,12.37 20.9,12.24 22.87,12.24 22.99,12.36 U1.U9
SDQ20: length 18.8
  TOP w0.102: UD1.C2 13.27,12.28 13.63,11.91 14.12,11.91 14.27,12.06 14.88,12.06 15.37,12.55 15.37,12.74 14.93,13.18 14.93,13.34 15.03,13.44 15.17,13.44 15.65,12.97 15.79,12.97 15.93,13.11 15.93,13.52 16.06,13.65 16.42,13.65 16.66,13.89 16.66,14.25 17.22,14.81 20.09,14.81 20.19,14.71 20.19,13.92 20.29,13.82 20.44,13.82 20.54,13.92 20.54,14.71 20.65,14.81 21,14.81 21.08,14.73 21.08,13.97 21.23,13.82 21.46,13.82 21.56,13.93 21.56,14.45 21.66,14.55 21.81,14.55 21.91,14.45 21.91,13.93 22.02,13.82 23.19,13.82 23.29,13.72 24.02,13.72 U1.T6
SDQ21: length 18.8
  TOP w0.102: UD1.F2 13.49,14.53 14.53,14.53 14.83,14.83 16.24,14.83 16.89,15.49 16.89,17.17 16.99,17.27 17.42,17.27 17.52,17.17 17.52,16.61 17.62,16.51 17.77,16.51 17.87,16.61 17.87,17.17 17.98,17.27 18.13,17.27 18.23,17.17 18.23,16.61 18.33,16.51 18.48,16.51 18.59,16.61 18.59,17.17 18.69,17.27 18.84,17.27 18.94,17.17 18.94,16.61 19.04,16.51 19.2,16.51 19.3,16.61 19.3,17.17 19.4,17.27 19.55,17.27 19.65,17.17 19.65,16.61 19.75,16.51 20.12,16.51 20.35,16.28 20.35,15.7 20.52,15.52 21.56,15.52 21.82,15.27 22.19,15.27 22.79,14.66 23.44,14.66 23.74,14.96 U1.U5
SDQ22: length 20.7
  TOP w0.102: UD1.B2 13.43,11.63 13.79,11.27 14.03,11.27 14.22,11.46 14.38,11.46 14.45,11.53 14.45,11.73 14.55,11.83 14.81,11.83 14.88,11.76 14.88,11.56 14.99,11.46 15.15,11.46 15.28,11.59 15.28,11.74 15.25,11.77 15.25,11.92 15.35,12.03 15.5,12.03 15.54,11.99 15.68,11.99 15.79,12.1 15.79,12.24 15.75,12.28 15.75,12.42 15.86,12.53 16,12.53 16.04,12.49 16.18,12.49 16.29,12.6 16.29,12.74 16.25,12.78 16.25,12.92 16.36,13.03 16.5,13.03 16.54,12.99 16.68,12.99 16.79,13.1 16.79,13.25 16.75,13.28 16.75,13.43 16.92,13.59 17.14,13.59 17.24,13.69 17.24,14.33 17.34,14.43 17.5,14.43 17.6,14.33 17.6,13.61 17.68,13.54 17.87,13.54 17.95,13.61 17.95,14.35 18.05,14.45 18.21,14.45 18.31,14.35 18.31,13.61 18.39,13.54 18.59,13.54 18.66,13.61 18.66,14.35 18.77,14.45 18.92,14.45 19.02,14.35 19.02,13.61 19.1,13.54 19.3,13.54 19.38,13.61 19.38,14.35 19.48,14.45 19.63,14.45 19.73,14.35 19.73,13.56 19.83,13.46 24.41,13.46 U1.T7
SDQ23: length 19.7
  TOP w0.102: U1.T5 24.49,14.96 24.18,14.66 23.73,14.66 23.52,14.46 23.13,14.46 22.98,14.3 22.65,14.3 22.04,14.91 21.67,14.91 21.42,15.17 20.02,15.17 19.92,15.27 19.92,16.05 19.82,16.15 19.67,16.15 19.57,16.05 19.57,15.27 19.47,15.17 19.31,15.17 19.21,15.27 19.21,16.05 19.11,16.15 18.96,16.15 18.86,16.05 18.86,15.27 18.75,15.17 18.6,15.17 18.5,15.27 18.5,16.05 18.4,16.15 18.25,16.15 18.14,16.05 18.14,15.27 18.04,15.17 17.89,15.17 17.79,15.27 17.79,16.05 17.69,16.15 17.54,16.15 17.43,16.05 17.43,15.27 17.33,15.17 17.07,15.17 15.77,13.86 13.47,13.86 UD1.E2
SDQ24: length 30.2
  TOP w0.102: UD1.C9 7.62,12.28 8.09,11.81 8.09,11.51 8.26,11.34 8.42,11.34 8.95,10.81 8.95,10.16 8.9,10.11 8.9,8.56 9.52,7.94 9.66,7.94 9.76,8.04 9.9,8.04 10.01,7.93 10.01,7.78 9.91,7.69 9.91,7.54 10.02,7.44 10.17,7.44 10.26,7.53 10.4,7.53 10.51,7.42 10.51,7.28 10.42,7.19 10.42,7.04 10.52,6.93 10.67,6.93 10.76,7.03 10.91,7.03 11.01,6.92 11.01,6.78 10.92,6.68 10.92,6.54 11.27,6.18 11.5,6.18 11.61,6.28 11.61,6.44 11.71,6.54 11.86,6.54 11.96,6.44 11.96,6.28 12.06,6.18 12.21,6.18 12.32,6.28 12.32,6.44 12.42,6.54 12.57,6.54 12.67,6.44 12.67,6.28 12.77,6.18 13.63,6.18 v1(13.74,6.3) ; U1.R9 25.26,12.36 25.1,12.52 25.1,12.69 v1(25.03,12.75)
  L3 w0.102: v1(25.03,12.75) 23.02,12.75 22.67,12.4 22.52,12.4 22.14,12.78 22,12.78 21.89,12.67 21.89,12.53 22.27,12.15 22.27,12.01 22.16,11.9 22.02,11.9 21.64,12.28 21.5,12.28 21.39,12.17 21.39,12.03 21.77,11.65 21.77,11.51 20.33,10.07 20.33,8.9 18.84,7.41 15.79,7.41 15.19,6.81 14.25,6.81 v1(13.74,6.3)
